# EAGLE board SparkFun_GPS_ZED-F9K_uHat (EAGLE 9.5.1)
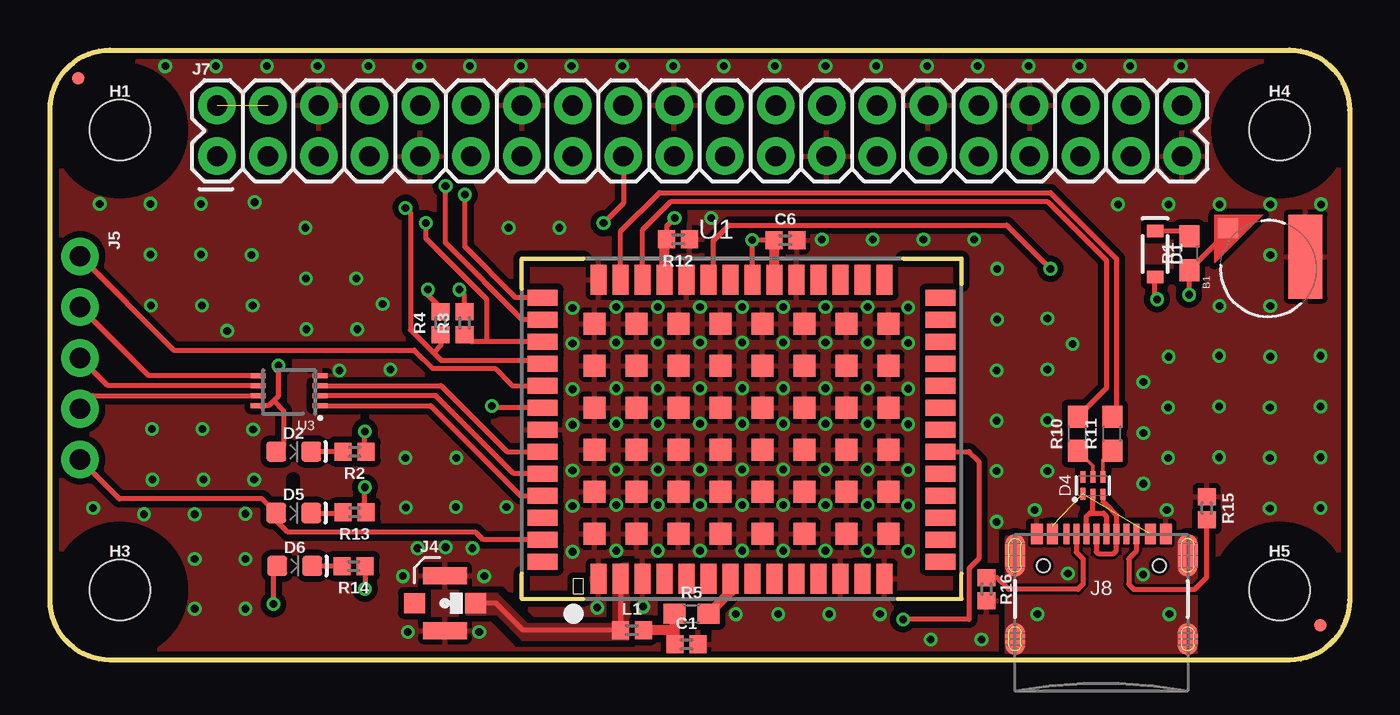
[diagram p0: board, top side]
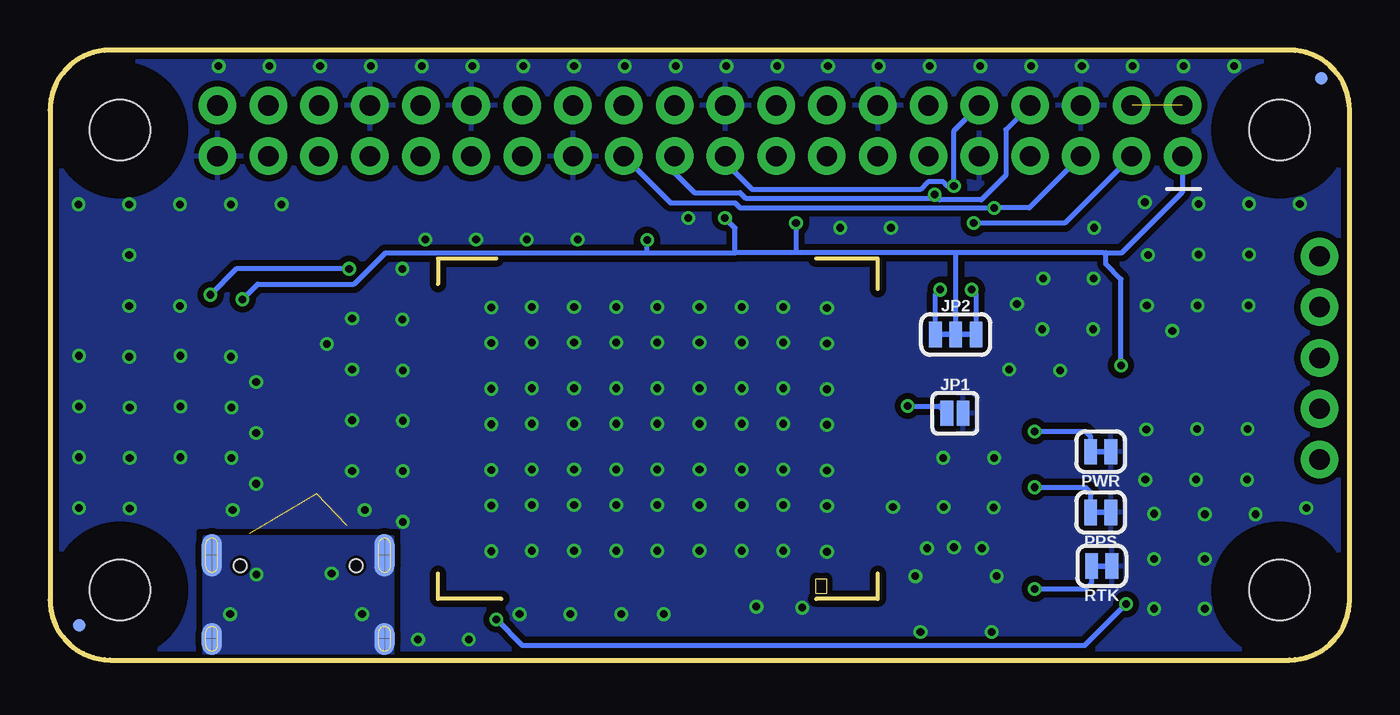
[diagram p1: board, bottom side, seen from below]

Size 65 x 30.5 mm. Coordinates in mm from the lower left corner, seen from the top.
Outline: 3,30.5 62,30.5 arc-90 65,27.5 65,3 arc-90 62,0 3,0 arc-90 0,3 0,27.5 arc-90 3,30.5
Copper layers (1*16): Top 0.035mm / dielectric 1.5mm / Bottom 0.035mm
Design rules "SparkFun-2-layer-TIGHT *": minimum track width 7mil, minimum drill 15mil, track to track 6mil, track to pad 6mil, pad to pad 6mil, via to via 6mil, smd to smd 6mil, copper to edge 7mil, drill to drill 7mil, minimum pad ring 7mil, minimum via ring 6mil, stop-mask expansion 4mil, vias tented up to drill 25mil, thermal gap 10mil
tRestrict: area 58.4,0.4 to 64.6,6.6; area 0.4,0.4 to 6.6,6.6; area 58.4,23.4 to 64.6,29.6; area 0.4,23.4 to 6.6,29.6; 1 lines
bRestrict: area 0.4,0.4 to 6.6,6.6; area 58.4,23.4 to 64.6,29.6; area 58.4,0.4 to 64.6,6.6; area 0.4,23.4 to 6.6,29.6

## Footprints (pad centres in the part's own frame; a part is rotated, then mirrored left to right if it is on the bottom)
ML414H_IV01E = smd 1 x 1: + 2.022,2.032 | smd 4.2 x 1.7: - 0.6,-1.85
0402 = smd 0.85 x 0.9: 1 -0.58,0; 2 0.58,0
SOD-323 = smd 0.63 x 0.83: A 1.15,0; C -1.15,0
LED-0603 = smd 1 x 1: A -0.877,0; C 0.877,0
SOT886 = smd 0.61 x 0.25: 1 -0.405,0.5 | smd 0.56 x 0.25: 2 -0.43,0; 3 -0.43,-0.5; 4 0.43,-0.5; 5 0.43,0; 6 0.43,0.5
FIDUCIAL-MICRO = smd 0.635 x 0.635: 1 0,0
STAND-OFF-TIGHT = hole 3.048: 0,0
U.FL = smd 2.2 x 0.85: 1 0,1.375; 2 0,-1.375 | smd 1.05 x 1: FEED 1.525,0; NC -1.525,0
1X05_NO_SILK = drill 1.016 pad 1.88: 1 0,0; 2 2.54,0; 3 5.08,0; 4 7.62,0; 5 10.16,0
2X20 = drill 1.016 pad 1.88: 1 0,0; 2 0,2.54; 3 2.54,0; 4 2.54,2.54; 5 5.08,0; 6 5.08,2.54; 7 7.62,0; 8 7.62,2.54; 9 10.16,0; 10 10.16,2.54; 11 12.7,0; 12 12.7,2.54; 13 15.24,0; 14 15.24,2.54; 15 17.78,0; 16 17.78,2.54; 17 20.32,0; 18 20.32,2.54; 19 22.86,0; 20 22.86,2.54; 21 25.4,0; 22 25.4,2.54; 23 27.94,0; 24 27.94,2.54; 25 30.48,0; 26 30.48,2.54; 27 33.02,0; 28 33.02,2.54; 29 35.56,0; 30 35.56,2.54; 31 38.1,0; 32 38.1,2.54; 33 40.64,0; 34 40.64,2.54; 35 43.18,0; 36 43.18,2.54; 37 45.72,0; 38 45.72,2.54; 39 48.26,0; 40 48.26,2.54
USB-C-16P = smd 0.3 x 1.016: A5 -1.25,0.154; A6 -0.25,0.154; A7 0.25,0.154; A8 1.25,0.154; B5 1.75,0.154; B6 0.75,0.154; B7 -0.75,0.154; B8 -1.75,0.154 | smd 0.6 x 1.016: GND -3.225,0.154; GND2 3.225,0.154 | smd 1 x 2.1: SHLD1 -4.32,-0.915; SHLD2 4.32,-0.915 | smd 1 x 2.1 bottom: SHLD3 -4.32,-0.915; SHLD4 4.32,-0.915 | smd 1 x 1.6: SHLD5 -4.32,-5.095; SHLD8 4.32,-5.095 | smd 1 x 1.6 bottom: SHLD6 -4.32,-5.095; SHLD7 4.32,-5.095 | smd 0.55 x 1.016: VBUS1 -2.45,0.154; VBUS2 2.45,0.154 | hole 0.65: -2.89,-1.445; 2.89,-1.445
SMT-JUMPER_2_NO_SILK = smd 0.635 x 1.27: 1 -0.406,0; 2 0.406,0
SMT-JUMPER_3_2-NC_TRACE_SILK = smd 0.635 x 1.27: 1 -1.016,0; 2 0,0; 3 1.016,0
SMT-JUMPER_2_NC_TRACE_SILK = smd 0.635 x 1.27: 1 -0.508,0; 2 0.508,0
0603 = smd 1.1 x 1: 1 -0.85,0; 2 0.85,0
UBLOX_ZED_F9K = smd 1.1 x 1.1: G1 -7.312,-5.37; G2 -5.212,-5.37; G3 -3.112,-5.37; G4 -1.012,-5.37; G5 1.088,-5.37; G6 3.188,-5.37; G7 5.288,-5.37; G8 7.388,-5.37; G9 7.388,-3.27; G10 5.288,-3.27; G11 3.188,-3.27; G12 1.088,-3.27; G13 -1.012,-3.27; G14 -3.112,-3.27; G15 -5.212,-3.27; G16 -7.312,-3.27; G17 -7.312,-1.17; G18 -5.212,-1.17; G19 -3.112,-1.17; G20 -1.012,-1.17; G21 1.088,-1.17; G22 3.188,-1.17; G23 5.288,-1.17; G24 7.388,-1.17; G25 7.388,0.93; G26 5.288,0.93; G27 3.188,0.93; G28 1.088,0.93; G29 -1.012,0.93; G30 -3.112,0.93; G31 -5.212,0.93; G32 -7.312,0.93; G33 -7.312,3.03; G34 -5.212,3.03; G35 -3.112,3.03; G36 -1.012,3.03; G37 1.088,3.03; G38 3.188,3.03; G39 5.288,3.03; G40 7.388,3.03; G41 7.388,5.13; G42 5.288,5.13; G43 3.188,5.13; G44 1.088,5.13; G45 -1.012,5.13; G46 -3.112,5.13; G47 -5.212,5.13; G48 -7.312,5.13 | smd 0.8 x 1.5: P1 -7.112,-7.62; P2 -6.012,-7.62; P3 -4.912,-7.62; P4 -3.812,-7.62; P5 -2.712,-7.62; P6 -1.612,-7.62; P7 -0.512,-7.62; P8 0.588,-7.62; P9 1.688,-7.62; P10 2.788,-7.62; P11 3.888,-7.62; P12 4.988,-7.62; P13 6.088,-7.62; P14 7.188,-7.62; P28 7.188,7.33; P29 6.088,7.33; P30 4.988,7.33; P31 3.888,7.33; P32 2.788,7.33; P33 1.688,7.33; P34 0.588,7.33; P35 -0.512,7.33; P36 -1.612,7.33; P37 -2.712,7.33; P38 -3.812,7.33; P39 -4.912,7.33; P40 -6.012,7.33; P41 -7.112,7.33 | smd 1.5 x 0.8: P15 9.988,-6.77; P16 9.988,-5.67; P17 9.988,-4.57; P18 9.988,-3.47; P19 9.988,-2.37; P20 9.988,-1.27; P21 9.988,-0.17; P22 9.988,0.93; P23 9.988,2.03; P24 9.988,3.13; P25 9.988,4.23; P26 9.988,5.33; P27 9.988,6.43; P42 -9.912,6.43; P43 -9.912,5.33; P44 -9.912,4.23; P45 -9.912,3.13; P46 -9.912,2.03; P47 -9.912,0.93; P48 -9.912,-0.17; P49 -9.912,-1.27; P50 -9.912,-2.37; P51 -9.912,-3.47; P52 -9.912,-4.57; P53 -9.912,-5.67; P54 -9.912,-6.77
SOP_8-PIN = smd 0.75 x 0.25: P1 -0.047,-0.014; P2 -0.047,-0.514; P3 -0.047,-1.014; P4 -0.047,-1.514; P5 3.053,-1.514; P6 3.053,-1.014; P7 3.053,-0.514; P8 3.053,-0.014

## Placement (x,y rotation side)
B1  ML414H_IV01E_BATTERY  [ML414H_IV01E]  60.94,19.57 90 top
C1  0.1uF  [0402]  31.84,0.78 0 top
C6  1.0uF  [0402]  36.78,20.99 0 top
D1  0.5A/40V/420mV  [SOD-323]  55.27,20.31 270 top
D2  RED  [LED-0603]  12.19,10.41 0 top
D4  PRTR5V0U2F  [SOT886]  52.17,8.72 90 top
D5  BLUE  [LED-0603]  12.19,7.35 0 top
D6  BLUE  [LED-0603]  12.25,4.7 0 top
FD1  FIDUCIALUFIDUCIAL  [FIDUCIAL-MICRO]  1.42,29.09 180 top
FD2  FIDUCIALUFIDUCIAL  [FIDUCIAL-MICRO]  63.54,1.73 0 bottom
FD3  FIDUCIALUFIDUCIAL  [FIDUCIAL-MICRO]  1.42,29.09 180 bottom
FD4  FIDUCIALUFIDUCIAL  [FIDUCIAL-MICRO]  63.54,1.73 0 top
FRAME2  FRAME-LEDGER  [CREATIVE_COMMONS]  1.78,-16.26 0 top  (outside the outline)
H1  STAND-OFFTIGHT  [STAND-OFF-TIGHT]  3.5,26.5 0 top
H3  STAND-OFFTIGHT  [STAND-OFF-TIGHT]  3.5,3.5 0 top
H4  STAND-OFFTIGHT  [STAND-OFF-TIGHT]  61.5,26.5 0 top
H5  STAND-OFFTIGHT  [STAND-OFF-TIGHT]  61.5,3.5 0 top
J4  U.FL  [U.FL]  19.75,2.84 0 top
J5  [1X05_NO_SILK]  1.51,20.18 270 top
J7  RASPBERRYPI-40-PIN-GPIO_PTH_NO_SHROUD  [2X20]  8.36,25.19 0 top
J8  [USB-C-16P]  52.59,6.15 0 top
JP1  JUMPER-SMT_2_NO_SILK  [SMT-JUMPER_2_NO_SILK]  19.74,12.34 0 bottom
JP2  JUMPER-SMT_3_2-NC_TRACE_SILK  [SMT-JUMPER_3_2-NC_TRACE_SILK]  19.7,16.28 0 bottom
L1  3.9NH  [0402]  29.11,1.5 0 top
PPS  JUMPER-SMT_2_NC_TRACE_SILK  [SMT-JUMPER_2_NC_TRACE_SILK]  12.45,7.38 180 bottom
PWR  JUMPER-SMT_2_NC_TRACE_SILK  [SMT-JUMPER_2_NC_TRACE_SILK]  12.45,10.41 180 bottom
R1  3.3k  [0603]  56.98,20.33 90 top
R2  1KOHM-0402-1/16W-1%  [0402]  15.24,10.41 180 top
R3  2.2K  [0402]  20.74,16.84 90 top
R4  2.2K  [0402]  19.55,16.84 90 top
R5  20  [0603]  32.09,2.32 0 top
R10  27  [0603]  51.4,11.31 90 top
R11  27  [0603]  53.13,11.31 90 top
R12  100K  [0402]  31.42,21.03 180 top
R13  1KOHM-0402-1/16W-1%  [0402]  15.24,7.38 180 top
R14  1KOHM-0402-1/16W-1%  [0402]  15.19,4.7 180 top
R15  5.1k  [0402]  57.85,7.58 270 top
R16  5.1k  [0402]  46.85,3.54 90 top
RTK  JUMPER-SMT_2_NC_TRACE_SILK  [SMT-JUMPER_2_NC_TRACE_SILK]  12.39,4.7 180 bottom
U1  UBLOX_ZED_F9K  [UBLOX_ZED_F9K]  34.55,11.69 0 top
U3  TRIPLE_BUFFER_74LVC3G07  [SOP_8-PIN]  13.46,12.7 180 top

## Library data of the parts
B1 = SparkFun-Batteries; PROD_ID: BATT-14267
C1 = SparkFun-Capacitors; PROD_ID: CAP-12416
C6 = SparkFun-Capacitors; PROD_ID: CAP-12417
D1 = SparkFun-DiscreteSemi; PROD_ID: DIO-10955
D2 = SparkFun-LED; PROD_ID: DIO-00819
D4 = SparkFun-IC-Power; PROD_ID: DIO-14084
D5 D6 = SparkFun-LED; PROD_ID: DIO-08575
FD1-FD4 FRAME2 = SparkFun-Aesthetics
H1 H3-H5 = SparkFun-Hardware
J4 = SparkFun-Connectors; PROD_ID: CONN-09193; SF_ID: WRL-09144
J5 J7 = SparkFun-Connectors
J8 = SparkFun-Connectors; PROD_ID: CONN-14122
JP1 JP2 PPS PWR RTK = SparkFun-Jumpers
L1 = SparkFun-Coils; MFG_PART: BLM15HB121SN1D; PROD_ID: NDUC-14206
R1 = SparkFun-Resistors; PROD_ID: RES-07851
R2 R13 R14 = SparkFun-Resistors; PROD_ID: RES-14342
R3 R4 = SparkFun-Resistors; PROD_ID: RES-14341
R5 = SparkFun-Resistors; PROD_ID: RES-07862
R10 R11 = SparkFun-Resistors; PROD_ID: RES-09334
R12 = SparkFun-Resistors; PROD_ID: RES-13495
R15 R16 = SparkFun-Resistors; PROD_ID: RES-14340
U1 = classified; PROD_ID: IC-14677
U3 = classified

## Nets
3.3V: C6.1 D1.A D2.A J7.1 J7.17 JP2.2 R12.2 U1.P33 U1.P34 U1.P38 U3.P8
!RESET_IN: U1.P49 U3.P3
!RESET_OUT: J5.4 U3.P7
!SAFEBOOT_IN: J5.3 U3.P6
!SAFEBOOT_OUT: U1.P50 U3.P2
D_SEL: JP1.1 U1.P47
DMINUS: R10.2 U1.P39
DPLUS: R11.2 U1.P40
GND: B1.- C1.2 C6.2 J4.1 J4.2 J7.6 J7.9 J7.14 J7.20 J7.25 J7.30 J7.34 J7.39 J8.GND J8.GND2 JP1.2 PPS.1 PWR.1 R12.1 R15.1 R16.1 RTK.1 U1.G1 U1.G2 U1.G3 U1.G4 U1.G5 U1.G6 U1.G7 U1.G8 U1.G9 U1.G10 U1.G11 U1.G12 U1.G13 U1.G14 U1.G15 U1.G16 U1.G17 U1.G18 U1.G19 U1.G20 U1.G21 U1.G22 U1.G23 U1.G24 U1.G25 U1.G26 U1.G27 U1.G28 U1.G29 U1.G30 U1.G31 U1.G32 U1.G33 U1.G34 U1.G35 U1.G36 U1.G37 U1.G38 U1.G39 U1.G40 U1.G41 U1.G42 U1.G43 U1.G44 U1.G45 U1.G46 U1.G47 U1.G48 U1.P1 U1.P3 U1.P12 U1.P14 U1.P32 U1.P37 U1.P41 U1.P48 U3.P4
INT_IN: U1.P51 U3.P1
INT_OUT: J5.2 U3.P5
N$1: JP2.1 R3.2
N$2: D1.C R1.2
N$3: JP2.3 R4.2
N$4: D2.C R2.2
N$5: C1.1 L1.2 R5.1
N$8: PWR.2 R2.1
N$10: J7.2 J7.4
N$12: J8.B5 R15.2
N$16: D4.5 R10.1
N$17: D4.4 R11.1
N$18: J8.A5 R16.2
N$22: R14.1 RTK.2
N$23: PPS.2 R13.1
N$24: D5.C R13.2
N$25: D6.C R14.2
PPS: D5.A J5.5 U1.P53
RF_IN: J4.FEED L1.1 U1.P2
RTK_STAT: D6.A U1.P20
RXI2: U1.P26
RXI/MOSI: J7.10 J7.19 U1.P43
SCL/CLK: J7.5 J7.23 R4.1 U1.P45
SDA/!CS: J7.3 R3.1 U1.P44
SHIELD: J8.SHLD1 J8.SHLD2 J8.SHLD3 J8.SHLD4 J8.SHLD5 J8.SHLD6 J8.SHLD7 J8.SHLD8
TX_READY: J5.1 U1.P46
TXO2: U1.P27
TXO/MISO: J7.8 J7.21 U1.P42
USB_D+: D4.3 J8.A6 J8.B6
USB_D-: D4.2 J8.A7 J8.B7
V_BATT: B1.+ R1.1 U1.P36
V_RF: R5.2 U1.P7
V_USB: D4.1 J8.VBUS1 J8.VBUS2
VIN: D4.6

## Tracks (layer width: path | path; a pad name or v marks a point on that pad's centre or on a via)
3.3V  (via drill 0.38)
  Top 0.254: 30.74,20.93 R12.2 30.84,21.7 v31.24,22.1 | 36.05,20.84 36.18,20.97 C6.1 35.14,20.99 v35.13,21.01 35.13,19.03 U1.P34 | v55.37,18.03 55.27,18.13 D1.A | J7.17 28.68,22.84 v27.69,21.84 | U3.P8 10.94,12.71 11.18,12.95 | 11.18,12.95 11.43,13.21 v11.43,14.73 | 11.18,12.95 11.68,12.45 11.68,10.78 D2.A
  Top 0.508: U1.P38 30.74,20.93 | U1.P33 36.24,20.91 36.18,20.97
  Bottom 0.254: J7.1 8.36,23.39 11.38,20.37 12.19,20.37 | 12.32,20.37 19.81,20.37 | 19.81,20.37 27.69,20.37 | 27.69,20.37 30.73,20.37 | 35.08,20.34 30.73,20.34 30.73,20.37 | 35.08,20.34 48.23,20.34 49.78,18.8 54.61,18.8 v55.37,18.03 | 30.73,20.37 30.73,21.59 v31.24,22.1 | 35.08,20.34 35.13,20.4 v35.13,21.01 | v27.69,21.84 27.69,20.37 | 12.31,20.36 12.32,20.37 | 19.68,16.29 JP2.2 19.7,20.26 19.81,20.37 | 12.32,20.37 12.19,20.37 | v11.43,14.73 11.43,19.05 12.19,19.81 12.19,20.37
!RESET_IN
  Top 0.254: U3.P3 19.56,13.71 22.86,10.41 U1.P49
!RESET_OUT
  Top 0.254: J5.4 2.16,13.21 U3.P7
!SAFEBOOT_IN
  Top 0.254: J5.3 2.9,13.71 U3.P6
!SAFEBOOT_OUT
  Top 0.254: U1.P50 23.19,9.32 19.3,13.21 U3.P2
D_SEL  (via drill 0.38)
  Top 0.254: U1.P47 22.18,12.62 v22.1,12.7
  Bottom 0.254: v22.1,12.7 20.5,12.7 JP1.1
DMINUS
  Top 0.254: U1.P39 29.64,21.51 31.06,22.94 49.89,22.94 52.83,20 52.83,13.59 R10.2
DPLUS
  Top 0.254: U1.P40 28.54,21.43 30.48,23.37 50.04,23.37 53.34,20.07 53.34,12.38 R11.2
GND  (via drill 0.38)
  other vias: 49.26,7.5 46.59,1.02 55.86,7.5 33.07,22.1 38.61,21.03 29.67,2.67 27.38,2.62 28.32,17.65 30.4,17.65 32.51,17.65 34.62,17.65 36.68,17.65 38.79,17.65 40.89,17.65 28.32,15.88 30.4,15.88 32.51,15.88 34.62,15.88 36.68,15.88 38.79,15.88 40.89,15.88 28.32,13.59 30.4,13.59 32.51,13.59 34.62,13.59 36.68,13.59 38.79,13.59 40.89,13.59 28.32,11.81 30.4,11.81 32.51,11.81 34.62,11.81 36.68,11.81 38.79,11.81 40.89,11.81 28.32,9.53 30.4,9.53 32.51,9.53 34.62,9.53 36.68,9.53 38.79,9.53 40.89,9.53 28.32,7.75 30.4,7.75 32.51,7.75 34.62,7.75 36.68,7.75 38.79,7.75 40.89,7.75 28.32,5.46 30.4,5.46 32.51,5.46 34.62,5.46 36.68,5.46 38.79,5.46 40.89,5.46 21.72,4.19 21.13,5.59 18.39,5.59 17.65,4.19 17.91,1.4 21.46,1.4 19.79,5.64 14.48,14.48 20.29,7.65 20.32,10.11 17.78,10.11 17.81,7.62 10.16,11.53 7.62,11.56 5.11,11.56 7.24,5.05 7.24,2.57 5.13,9.02 7.67,9.02 10.21,9.02 10.08,20.24 7.54,20.27 5.03,20.27 5.05,17.73 7.59,17.73 10.13,17.73 15.32,19.08 12.8,19.08 12.83,16.54 15.37,16.54 17.02,14.53 9.78,5.05 9.78,2.57 47.37,17.02 47.35,14.48 47.35,11.96 49.89,11.99 49.89,14.53 49.89,17.07 55.96,15.16 55.93,12.62 55.93,10.11 58.47,10.13 58.47,12.67 58.47,15.21 61.04,15.16 61.01,12.62 61.01,10.11 63.55,10.13 63.55,12.67 63.55,15.21 5.03,22.81 2.49,22.81 7.54,22.81 13.39,29.69 2.16,7.59 7.24,7.29 9.78,7.32 61.01,7.57 63.55,7.59 61.04,17.7 58.5,17.7 61.04,20.24 61.04,22.78 58.5,22.78 63.58,22.78 55.96,22.78 53.42,22.78 49.89,9.45 47.35,9.45 47.35,6.91 12.78,21.62 10.24,22.89 22.94,21.62 25.48,21.62 26.14,17.6 26.14,15.82 26.14,13.54 26.14,11.76 26.14,9.47 26.14,7.7 26.14,5.41 42.93,17.63 42.93,15.85 42.93,13.56 42.93,11.79 42.93,9.5 42.93,7.72 42.93,5.44 47.37,19.56 41.15,21.03 43.69,21.03 46.23,21.03 15.93,29.69 18.47,29.69 21.01,29.69 23.55,29.69 26.09,29.69 28.63,29.69 31.17,29.69 33.71,29.69 36.25,29.69 38.79,29.69 41.33,29.69 43.87,29.69 46.41,29.69 48.95,29.69 51.49,29.69 54.03,29.69 56.57,29.69 10.85,29.69 8.31,29.69 5.77,29.69 44.05,1.02 41.51,2.29 38.97,2.29 36.43,2.29 34.3,2.29 16.64,17.81 8.86,16.46 22.83,7.65 54.69,13.89 54.69,11.35 54.69,8.81 51.16,15.8 4.7,7.29
  pour Top (isolate 0.305, rank 3): 62,0 3,0 arc-90 0,3 0,27.5 arc-90 3,30.5 62,30.5 arc-90 65,27.5 65,3 arc-90
  pour Bottom (isolate 0.305, rank 4): 62,0 3,0 arc-90 0,3 0,27.5 arc-90 3,30.5 62,30.5 arc-90 65,27.5 65,3 arc-90
INT_IN
  Top 0.254: U3.P1 19.04,12.71 23.53,8.22 U1.P51
INT_OUT
  Top 0.254: U3.P5 6.6,14.21 6.46,14.21 4.94,14.21 J5.2
N$1  (via drill 0.38)
  Top 0.254: R3.2 20.74,18.25 v20.47,18.52
  Bottom 0.254: JP2.1 20.71,18.27 v20.47,18.52
N$2
  Top 0.254: D1.C 56.7,21.46 R1.2
N$3  (via drill 0.38)
  Top 0.254: v18.9,18.52 18.9,18.26 19.55,17.61 R4.2
  Bottom 0.254: 18.68,18.3 JP2.3 | v18.9,18.52 18.68,18.3 | 18.68,18.3
N$4
  Top 0.254: R2.2 D2.C
N$5
  Top 0.508: C1.1 31.26,1.52 | 31.26,1.52 31.26,2.3 R5.1 | L1.2 29.71,1.52 31.26,1.52
N$8  (via drill 0.38)
  Top 0.254: R2.1 15.75,10.49 v15.75,11.43
  Bottom 0.254: v15.75,11.43 13.21,11.43 12.95,11.18 PWR.2
N$10  (1 unrouted)
N$12
  Top 0.254: J8.B5 54.34,5.44 53.96,5.06 53.96,3.79 54.21,3.54 57.26,3.54 57.85,4.13 R15.2
N$16
  Top 0.178: D4.5 52.17,9.7 R10.1
N$17
  Top 0.178: R11.1 52.67,10 D4.4
N$18
  Top 0.254: J8.A5 51.34,5.4 51.67,5.06 51.67,3.79 51.42,3.54 47.95,3.54 47.37,4.12 R16.2
N$22  (via drill 0.38)
  Top 0.254: R14.1 15.77,3.57 v15.75,3.56
  Bottom 0.254: v15.75,3.56 13.21,3.56 12.9,3.86 RTK.2
N$23  (via drill 0.38)
  Top 0.254: R13.1 15.75,7.45 v15.75,8.64
  Bottom 0.254: v15.75,8.64 13.21,8.64 12.95,8.38 PPS.2
N$24
  Top 0.254: 13.03,7.39 D5.C 14.63,7.35 R13.2
N$25
  Top 0.254: R14.2 D6.C
PPS
  Top 0.254: U1.P53 21.67,6.02 21.29,6.4 11.89,6.4 11.31,6.97 D5.A 10.6,8.06 3.47,8.06 J5.5
RF_IN
  Top 0.254: U1.P2 L1.1 23.65,1.5 22.3,2.84 J4.FEED
  pour Top (isolate 0.305, no thermals): 28.19,4.83 28.19,1.78 23.88,1.78 22.35,3.3 20.83,3.3 20.83,2.29 22.35,2.29 23.62,1.02 28.96,1.02 28.96,4.83
RTK_STAT  (via drill 0.38)
  Top 0.254: U1.P20 45.97,10.42 46.46,9.93 46.46,5.05 45.97,4.57 45.97,2.03 v42.67,2.03 | v11.18,2.79 11.18,4.51 D6.A
  Bottom 0.254: v42.67,2.03 41.38,0.74 13.23,0.74 v11.18,2.79
RXI/MOSI  (via drill 0.38)
  Top 0.254: U1.P43 23.62,17.02 19.79,20.85 v19.79,23.7
  Bottom 0.254: J7.19 31.22,24.87 29.87,23.52 21.46,23.52 21.08,23.9 20.32,23.9 20.12,23.7 v19.79,23.7 19.79,26.46 J7.10
SCL/CLK  (via drill 0.38)
  Top 0.254: U1.P45 24.47,14.99 19.56,14.99 19.18,15.37 | v17.78,22.61 18.03,22.35 18.03,16.51 19.18,15.37 | 19.54,16.26 R4.1 19.55,15.73 19.18,15.37
  Bottom 0.254: J7.23 33.97,22.86 30.73,22.86 30.48,22.61 v17.78,22.61 16.02,22.61 J7.5
SDA/!CS  (via drill 0.38)
  Top 0.254: 21.84,15.92 21.08,15.92 R3.1 | U1.P44 21.84,15.92 | v18.8,21.84 18.8,21.08 21.84,18.03 21.84,15.92
  Bottom 0.254: J7.3 14.25,21.84 v18.8,21.84
SHIELD  (via drill 0.38)
  other vias: 55.99,2.29 49.39,2.29 50.91,4.32 54.67,4.27
  pour Bottom (no thermals): 47.86,0.26 47.86,6.13 57.29,6.13 57.29,0.26
  pour Top (no thermals): 47.86,0.26 47.86,6.13 57.29,6.13 57.29,0.26
TX_READY
  Top 0.254: J5.1 6.2,15.49 18.22,15.49 19.13,14.58 22.25,14.58 23.11,13.72 U1.P46
TXO/MISO  (via drill 0.38)
  Top 0.254: U1.P42 23.28,18.12 20.75,20.65 v20.75,23.27
  Bottom 0.254: J7.21 33.76,24.36 32.77,23.37 30.48,23.37 30.2,23.09 20.93,23.09 v20.75,23.27 20.5,23.01 18.41,23.01 17.2,24.23 17.2,26.51 J7.8
USB_D+
  Top 0.254: J8.A6 52.34,5.41 52.43,5.31 53.2,5.31 53.34,5.45 J8.B6 53.34,7.27 52.86,7.75 52.85,7.75 52.67,7.93 D4.3
USB_D-
  Top 0.254: 52.2,7.35 52,7.35 51.84,7.18 J8.B7 | 52.2,7.35 52.69,7.35 52.84,7.2 J8.A7 | 52.2,7.35 52.17,7.38 D4.2
V_BATT  (via drill 0.38)
  Top 0.254: 56.75,19.25 R1.1 | U1.P36 33.17,19.25 33.17,20.95 33.96,21.74 47.85,21.74 v50.04,19.56 | v56.97,18.26 v56.98,18.27 R1.1 | R1.1 58.91,21.41 B1.+
  Bottom 0.254: v50.04,19.56 55.68,19.56 v56.97,18.26
V_RF
  Top 0.508: U1.P7 34.04,3.41 R5.2
V_USB  (2 unrouted)
  Top 0.254: J8.VBUS1 50.14,6.71

## Text on the board
tDocu: Elias Santistevan